# Altium PCB MARLIN.PcbDoc
Units mm, origin at the board's own origin, x right, y up, seen from the top; angles counter-clockwise.
Board outline 104.66 x 106.66 mm, 4 copper layers (Signal Layer 1, Signal Layer 2, Signal Layer 3, Signal Layer 4), stack 2.375 mm thick; 4 components, 5 nets, 28 pads, 108 vias.
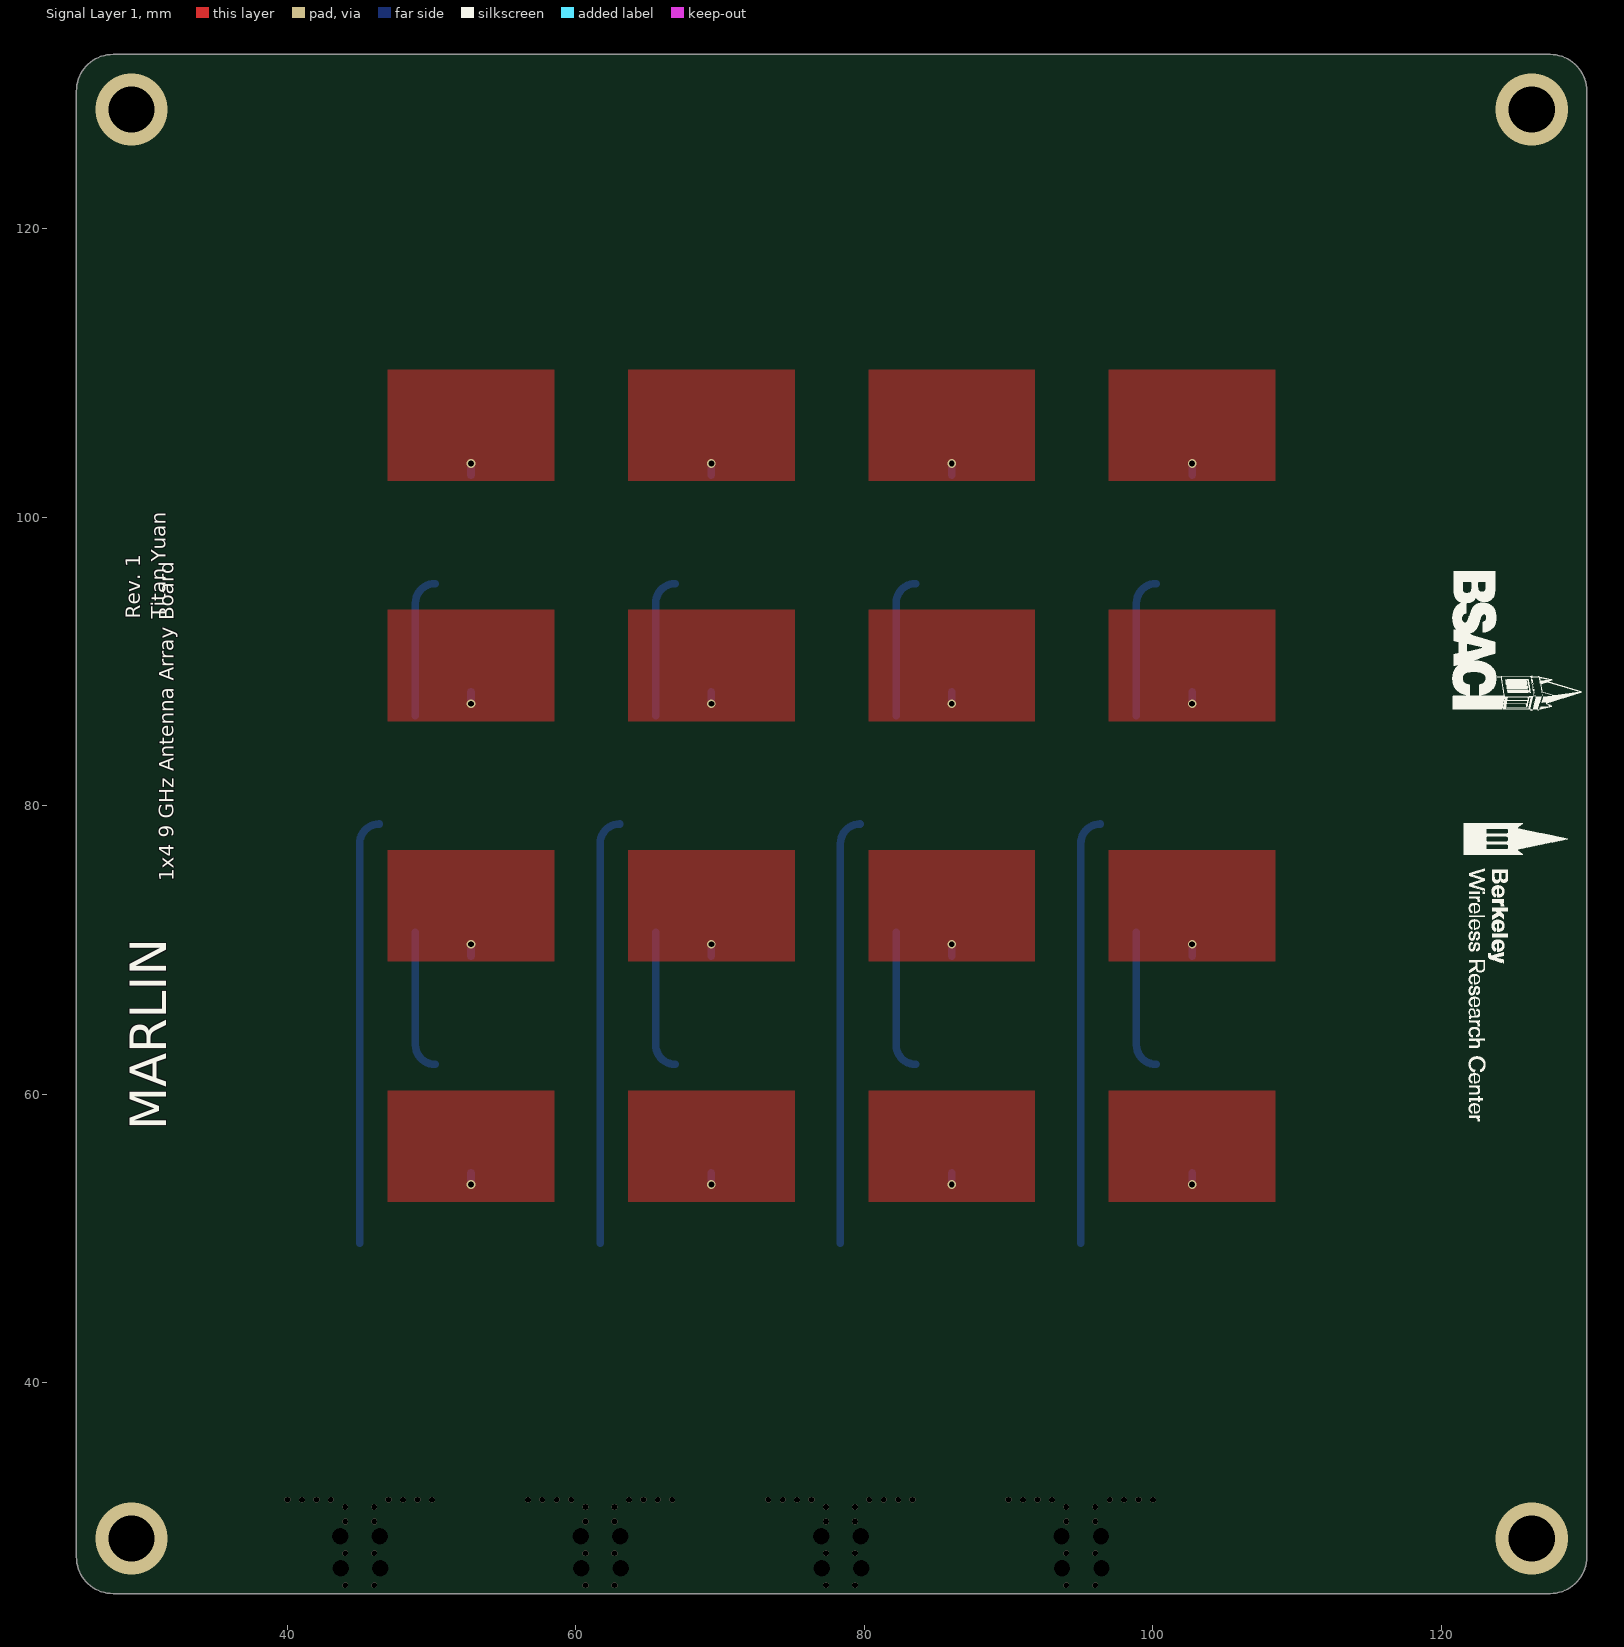
[diagram p0: Signal Layer 1 view]
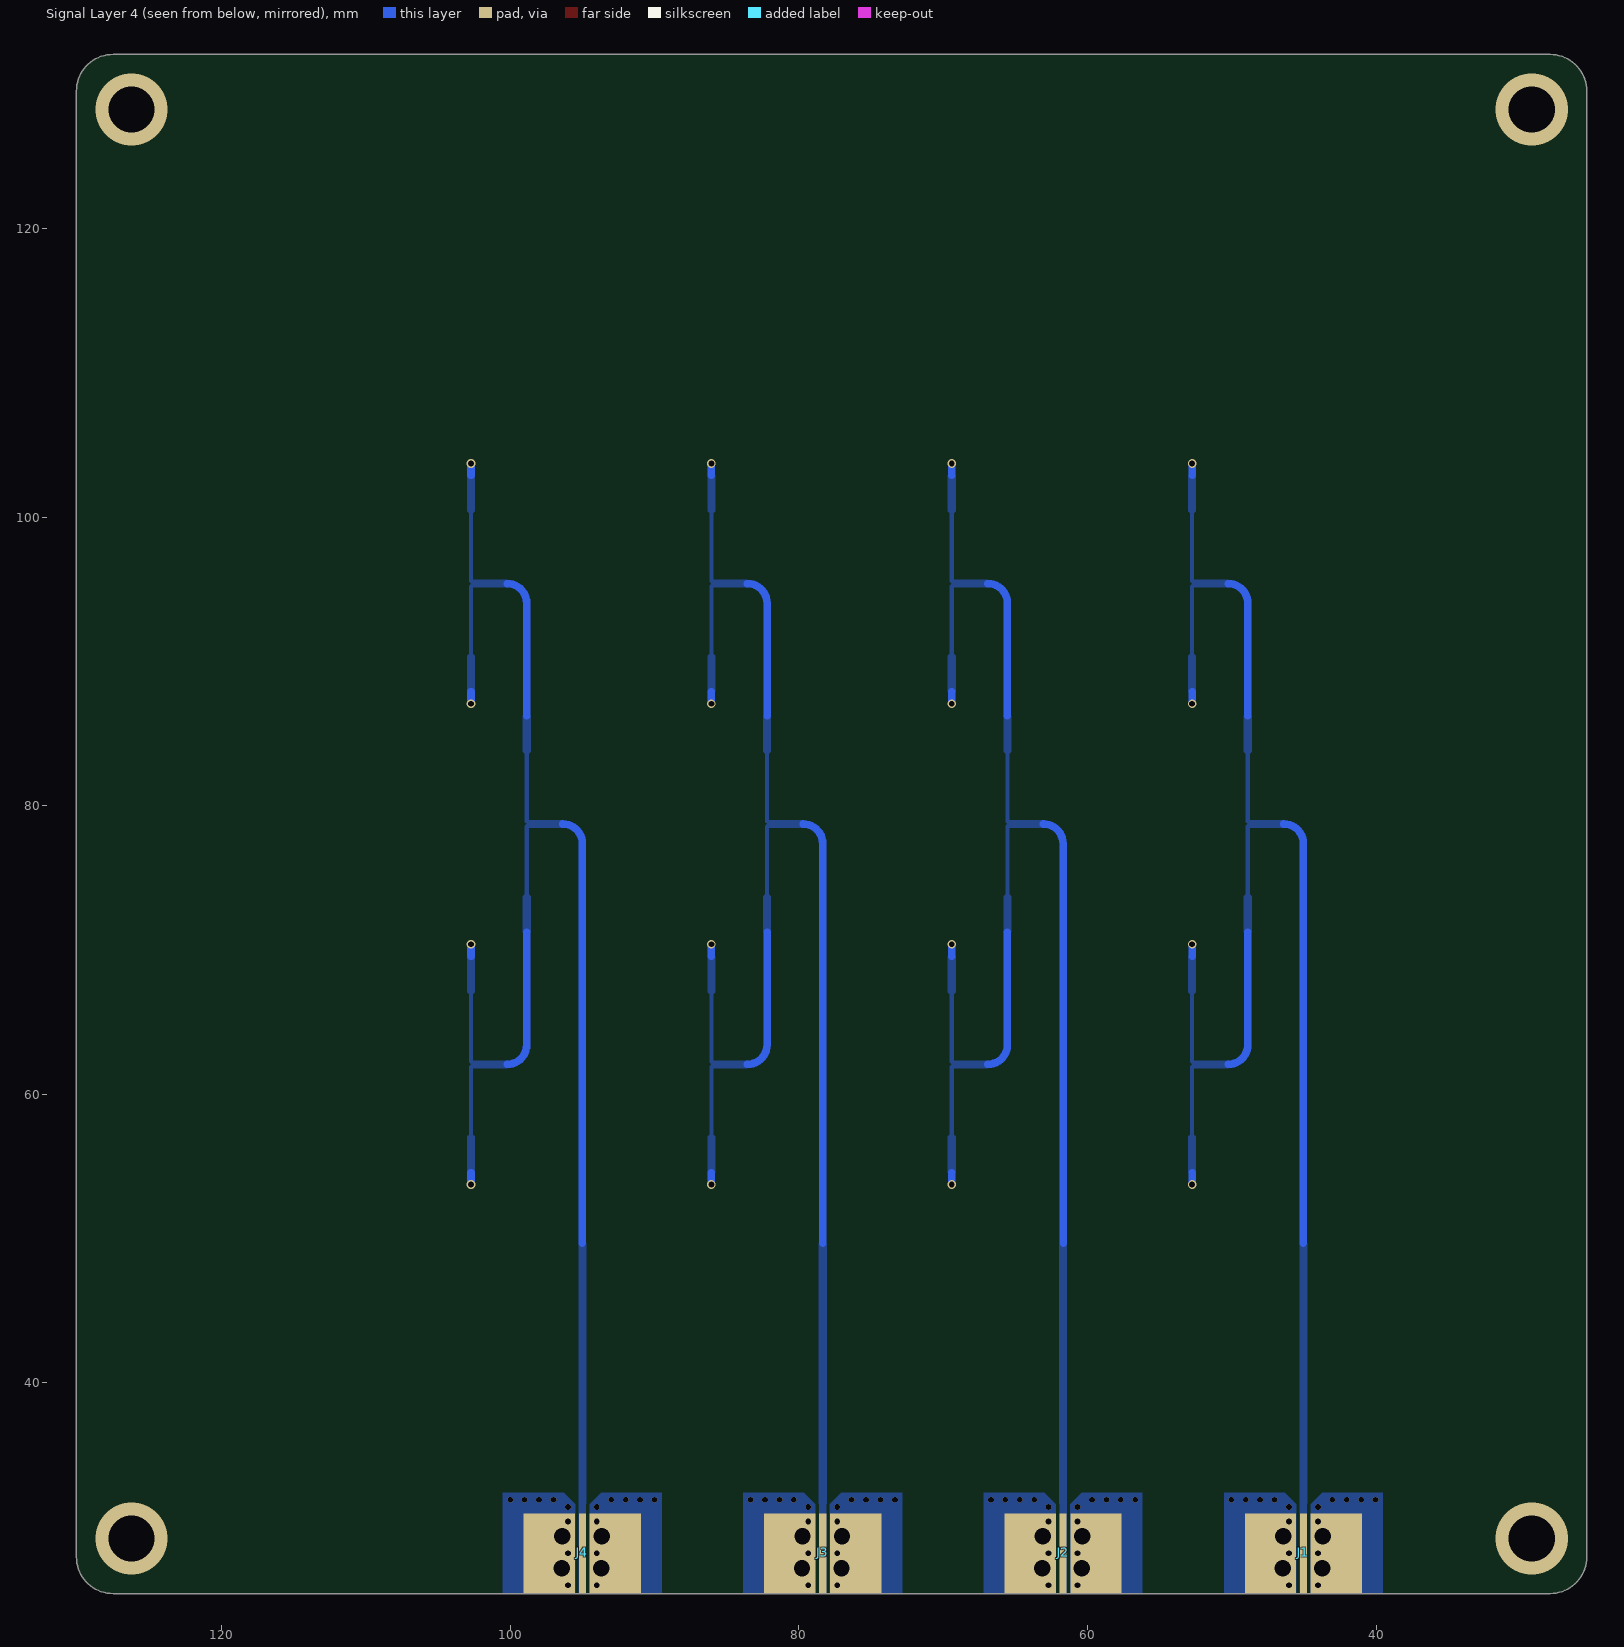
[diagram p1: Signal Layer 4 view, seen from below]
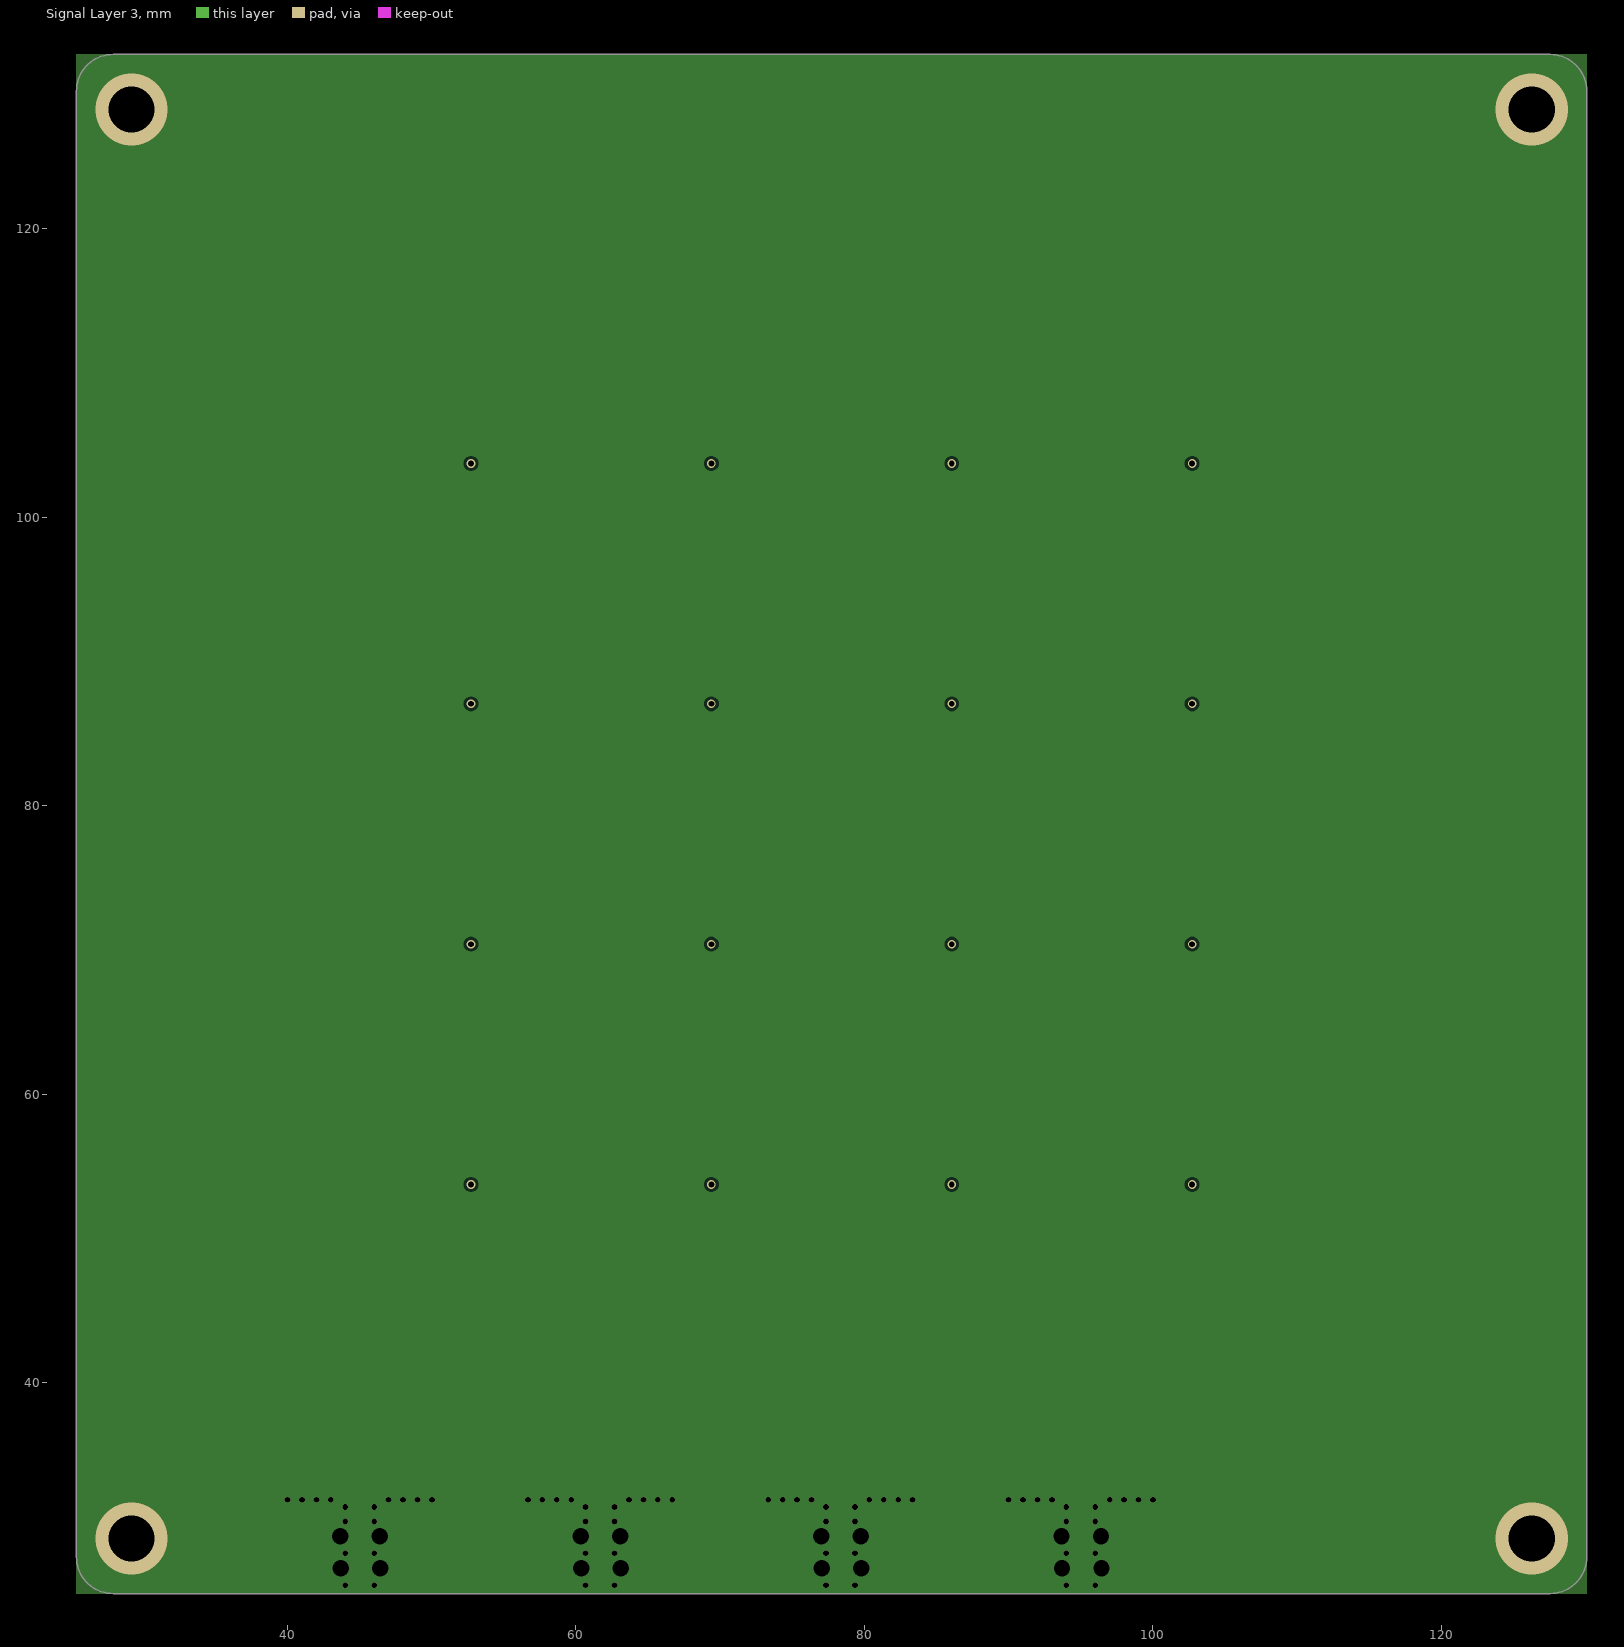
[diagram p2: Signal Layer 3]

## Layer stack, top to bottom
Top Solder: solder mask 0.0127, Solder Resist, Dk 3.5
Signal Layer 1: signal copper 0.035
Core 1: core 1.524, Rogers RO4350B, Dk 3.48
Signal Layer 2: signal copper 0.035
Prepreg 1: prepreg 0.4572, Rogers RO4450F Prepreg, Dk 3.52
Signal Layer 3: signal copper 0.035
Core 2: core 0.254, Rogers RO4350B, Dk 3.48
Signal Layer 4: signal copper 0.035
Bottom Solder: solder mask 0.0127, Solder Resist, Dk 3.5

## Board outline
27.94,25.4 cw(c27.94,27.94) 25.4,27.94 25.4,129.515 cw(c27.94,129.515) 27.94,132.055 127.515,132.055 cw(c127.515,129.515) 130.055,129.515 130.055,27.933 130.055,27.94 cw(c127.515,27.94) 127.515,25.4

## Design rules (kind name [scope] priority, off if disabled: settings)
Clearance [All] p1: gap=0.2 ignorepadtopadclearanceinfootprint=FALSE except(0: Arc-Fill Arc-Poly Arc-Region Track-Fill Track-Poly Track-Region)
PolygonConnect [All] p1: connectstyle=Direct reliefconductorwidth=0.254 reliefentries=4 polygonreliefangle="90 Angle" airgapwidth=0.254
RoutingVias [All] p1: holewidth=0.711 width=1.27 viastyle="Through Hole" minholewidth=0.711 minwidth=1.27 maxholewidth=0.711 maxwidth=1.27
SolderMaskExpansion [All] p1: expansion=0 istentingtop=FALSE
SupplyNets "Schematic Supply Nets" [InNet('GND')] p1: voltage=0.000
Width "50 Ω" [InNetClass('50 Ω')] p1: maxlimit=0.527 minlimit=0.527 preferedwidth=0.527
Width [All] p2: maxlimit=0.254 minlimit=0.254 preferedwidth=0.254
30 further rules are at their usual default settings.

## Classes and differential pairs
net class "50 Ω": ANTENNA_1 ANTENNA_2 ANTENNA_3 ANTENNA_4
component class MARLIN: J?

## Components (designator, comment, footprint, x,y, rotation, side; value= is the part's Value field where it differs from the comment)
J1 "901-10512-1" 901-10512-1 45.031,25.4 r90 bottom
J2 "901-10512-1" 901-10512-1 61.686,25.4 r90 bottom
J3 "901-10512-1" 901-10512-1 78.341,25.4 r90 bottom
J4 "901-10512-1" 901-10512-1 94.996,25.4 r90 bottom

## Footprints (in the part's own frame and the unit in brackets; to place one, negate y for a bottom-side part, rotate by r counter-clockwise, add the part's x,y. Pads: shape width x height; smd on the part's side, far side on the other; paste and mask are expansions set on the pad)
901-10512-1 [mm] "SMA PCB End Launch Straight Jack 50 Ohm 0.085 Square Flange High Frequency 0.015 Pin"
  rect 5.54x0.49 smd: 1(2.77,0)
  round 0 hole 1.14: 2(1.75,-1.3) 2(1.75,1.435) 2(3.96,-1.335) 2(3.96,1.4)
  rect 5.54x3.564 smd: 2(2.77,-2.283) 2(2.77,2.283)
  body extent -9.53,-3.18 4.55,3.18, height 3.36

## Part data
J1 J2 J3 J4: "RF / Coaxial Connector, SMA Coaxial, Straight Flanged Jack, Solder, 50 ohm, Beryllium Copper", Case/Package=SMA, Clock Frequency=26.5GHz, Manufacturer=Amphenol, Max Operating Temperature=165°C, Maximum Frequency="26.5 GHz", Min Operating Temperature=-65°C, Supplier Part Number=ARF2501-ND, Voltage Rating=170V, Category="RF / Coaxial Connectors", ComponentLink1Description=https://datasheet.octopart.com:443/901-10512-1-Amphenol-RF-datasheet-67291281.pdf?src-supplier=TME, ComponentLink1URL=https://datasheet.octopart.com:443/901-10512-1-Amphenol-RF-datasheet-67291281.pdf?src-supplier=TME, ComponentLink2Description=https://datasheet.octopart.com:443/901-10512-1-Amphenol-datasheet-151206439.pdf?src-supplier=IHS, ComponentLink2URL=https://datasheet.octopart.com:443/901-10512-1-Amphenol-datasheet-151206439.pdf?src-supplier=IHS, ComponentLink3Description=https://datasheet.octopart.com:443/901-10512-1-Amphenol-RF-datasheet-67291285.pdf?src-supplier=Newark, ComponentLink3URL=https://datasheet.octopart.com:443/901-10512-1-Amphenol-RF-datasheet-67291285.pdf?src-supplier=Newark, ComponentLink4Description=https://datasheet.octopart.com:443/901-10512-1-Amphenol-RF-datasheet-114836026.pdf?src-supplier=RS+(Formerly+Allied+Electronics), ComponentLink4URL=https://datasheet.octopart.com:443/901-10512-1-Amphenol-RF-datasheet-114836026.pdf?src-supplier=RS+(Formerly+Allied+Electronics), ComponentLink5Description=https://datasheet.octopart.com:443/901-10512-1-Amphenol-RF-datasheet-177020667.pdf?src-supplier=Burklin+Elektronik, ComponentLink5URL=https://datasheet.octopart.com:443/901-10512-1-Amphenol-RF-datasheet-177020667.pdf?src-supplier=Burklin+Elektronik, ComponentLink6Description=https://datasheet.octopart.com:443/901-10512-1-Amphenol-RF-datasheet-181430700.pdf?src-supplier=JRH+Electronics, ComponentLink6URL=https://datasheet.octopart.com:443/901-10512-1-Amphenol-RF-datasheet-181430700.pdf?src-supplier=JRH+Electronics, Connector Type="SMA, Socket", Contact Material=Copper, Fastening Type=Threaded, Impedance=50Ω, Lifecycle Status=Production, Manufacturer Part Number=901-10512-1, Mounting Technology="Edge, Through Hole", Orientation=Straight, Pricing="1=11.3, 10=9.599, 25=8.9976, 50=8.568, 100=8.159, 300=7.55083, 500=7.28374, 1000=6.93654 (USD)", RoHS=Compliant, Stock=96, Supplier=DigiKey, Termination=Solder

## Via types
v1: diameter 0.4, hole 0.4, Signal Layer 1 to Signal Layer 4, tented both sides, 64 vias
v2: diameter 0.4, hole 0.4, Signal Layer 1 to Signal Layer 4, 24 vias
v3: diameter 0.6, hole 0.4, Signal Layer 1 to Signal Layer 4, tented both sides, 16 vias
v4: diameter 5, hole 3.2, Signal Layer 1 to Signal Layer 4, 4 vias

## Nets (pads, with @x,y where several pads share a name; then routed paths per layer and width w, separated by ;. In a path a pad name is that pad's centre, name@x,y a point inside that pad or via, vN(x,y) a via of type N, cw(c..) or ccw(c..) an arc to the next point about the centre after c; other vN are vias at no path point)
ANTENNA_1: J1.1 | length 53
  Signal Layer 4 w0.527: 45.031,49.69 45.031,77.372 cw(c46.388,77.372) 46.388,78.729 ; 48.888,71.229 48.888,63.43 ccw(c50.245,63.43) 50.245,62.073 ; 48.888,86.229 48.888,94.027 cw(c50.245,94.027) 50.245,95.384 ; v3@52.742,53.749 v3(52.745,53.746) 52.745,54.573 ; v3@52.742,103.708 v3(52.745,103.711) 52.745,102.884 ; 52.745,69.573 v3(52.745,70.401) ; v3(52.745,87.056) 52.745,87.884
ANTENNA_2: J2.1 | length 53
  Signal Layer 4 w0.527: 61.686,49.69 61.686,77.372 cw(c63.043,77.372) 63.043,78.729 ; 65.543,71.229 65.543,63.43 ccw(c66.9,63.43) 66.9,62.073 ; 65.543,86.229 65.543,94.027 cw(c66.9,94.027) 66.9,95.384 ; v3@69.397,53.749 v3(69.4,53.746) 69.4,54.573 ; v3@69.397,103.708 v3(69.4,103.711) 69.4,102.884 ; 69.4,69.573 v3(69.4,70.401) ; v3(69.4,87.056) 69.4,87.884
ANTENNA_3: J3.1 | length 53
  Signal Layer 4 w0.527: 78.341,49.69 78.341,77.372 cw(c79.698,77.372) 79.698,78.729 ; 82.198,71.229 82.198,63.43 ccw(c83.555,63.43) 83.555,62.073 ; 82.198,86.229 82.198,94.027 cw(c83.555,94.027) 83.555,95.384 ; v3@86.052,53.749 v3(86.055,53.746) 86.055,54.573 ; v3@86.052,103.708 v3(86.055,103.711) 86.055,102.884 ; 86.055,69.573 v3(86.055,70.401) ; v3(86.055,87.056) 86.055,87.884
ANTENNA_4: J4.1 | length 53
  Signal Layer 4 w0.527: 94.996,49.69 94.996,77.372 cw(c96.353,77.372) 96.353,78.729 ; 98.853,71.229 98.853,63.43 ccw(c100.21,63.43) 100.21,62.073 ; 98.853,86.229 98.853,94.027 cw(c100.21,94.027) 100.21,95.384 ; v3@102.707,53.749 v3(102.71,53.746) 102.71,54.573 ; v3@102.707,103.708 v3(102.71,103.711) 102.71,102.884 ; 102.71,69.573 v3(102.71,70.401) ; v3(102.71,87.056) 102.71,87.884
GND: J1.2 J2.2 J3.2 J4.2
  other v1: 44.03,25.98 46.032,25.98 60.685,25.98 62.687,25.98 77.34,25.98 79.342,25.98 93.995,25.98 95.997,25.98 44.03,28.19 46.032,28.19 60.685,28.19 62.687,28.19 77.34,28.19 79.342,28.19 93.995,28.19 95.997,28.19 44.03,30.4 46.032,30.4 60.685,30.4 62.687,30.4 77.34,30.4 79.342,30.4 93.995,30.4 95.997,30.4 44.03,31.4 46.032,31.4 60.685,31.4 62.687,31.4 77.34,31.4 79.342,31.4 93.995,31.4 95.997,31.4 40.03,31.9 41.03,31.9 42.03,31.9 43.03,31.9 47.032,31.9 48.032,31.9 49.032,31.9 50.032,31.9 56.685,31.9 57.685,31.9 58.685,31.9 59.685,31.9 63.687,31.9 64.687,31.9 65.687,31.9 66.687,31.9 73.34,31.9 74.34,31.9 75.34,31.9 76.34,31.9 80.342,31.9 81.342,31.9 82.342,31.9 83.342,31.9 89.995,31.9 90.995,31.9 91.995,31.9 92.995,31.9 96.997,31.9 97.997,31.9 98.997,31.9 99.997,31.9
  other v2: 44.03,25.98 46.032,25.98 60.685,25.98 62.687,25.98 77.34,25.98 79.342,25.98 93.995,25.98 95.997,25.98 44.03,28.19 46.032,28.19 60.685,28.19 62.687,28.19 77.34,28.19 79.342,28.19 93.995,28.19 95.997,28.19 44.03,30.4 46.032,30.4 60.685,30.4 62.687,30.4 77.34,30.4 79.342,30.4 93.995,30.4 95.997,30.4
  other v4: 29.21,29.21 126.245,29.21 29.21,128.245 126.245,128.245

## Polygon pours and split planes (outlines as drawn)
ANTENNA_4 on Signal Layer 4 "ANTENNA_4_L04_P252" (solid, pour order 252): 102.71,95.384 102.579,95.253 102.579,90.518 102.446,90.385 102.446,87.884 102.974,87.884 102.974,90.385 102.84,90.518 102.84,95.253
ANTENNA_3 on Signal Layer 4 "ANTENNA_3_L04_P236" (solid, pour order 236): 79.698,78.992 79.698,78.465 82.198,78.465 82.198,78.992
ANTENNA_2 on Signal Layer 4 "ANTENNA_2_L04_P227" (solid, pour order 227): 63.043,78.992 63.043,78.465 65.543,78.465 65.543,78.992
ANTENNA_1 on Signal Layer 4 "ANTENNA_1_L04_P218" (solid, pour order 218): 46.388,78.992 46.388,78.465 48.888,78.465 48.888,78.992
ANTENNA_4 on Signal Layer 4 "ANTENNA_4_L04_P253" (solid, pour order 253): 102.446,102.884 102.974,102.884 102.974,100.382 102.84,100.249 102.84,95.514 102.71,95.384 102.579,95.514 102.579,100.249 102.446,100.382
ANTENNA_4 on Signal Layer 4 "ANTENNA_4_L04_P251" (solid, pour order 251): 100.21,95.648 100.21,95.12 102.71,95.12 102.71,95.648
ANTENNA_4 on Signal Layer 4 "ANTENNA_4_L04_P250" (solid, pour order 250): 102.446,69.573 102.974,69.573 102.974,67.072 102.84,66.939 102.84,62.204 102.71,62.073 102.579,62.204 102.579,66.939 102.446,67.072
ANTENNA_4 on Signal Layer 4 "ANTENNA_4_L04_P249" (solid, pour order 249): 102.71,62.073 102.579,61.943 102.579,57.208 102.446,57.075 102.446,54.573 102.974,54.573 102.974,57.075 102.84,57.208 102.84,61.943
ANTENNA_4 on Signal Layer 4 "ANTENNA_4_L04_P248" (solid, pour order 248): 100.21,62.337 100.21,61.81 102.71,61.81 102.71,62.337
ANTENNA_4 on Signal Layer 4 "ANTENNA_4_L04_P247" (solid, pour order 247): 98.589,86.229 99.117,86.229 99.117,83.727 98.983,83.594 98.983,78.859 98.853,78.729 98.722,78.859 98.722,83.594 98.589,83.727
ANTENNA_4 on Signal Layer 4 "ANTENNA_4_L04_P246" (solid, pour order 246): 98.853,78.729 98.722,78.598 98.722,73.863 98.589,73.73 98.589,71.229 99.117,71.229 99.117,73.73 98.983,73.863 98.983,78.598
ANTENNA_4 on Signal Layer 4 "ANTENNA_4_L04_P245" (solid, pour order 245): 96.353,78.992 96.353,78.465 98.853,78.465 98.853,78.992
ANTENNA_3 on Signal Layer 4 "ANTENNA_3_L04_P244" (solid, pour order 244): 85.791,102.884 86.319,102.884 86.319,100.382 86.185,100.249 86.185,95.514 86.055,95.384 85.924,95.514 85.924,100.249 85.791,100.382
ANTENNA_3 on Signal Layer 4 "ANTENNA_3_L04_P243" (solid, pour order 243): 86.055,95.384 85.924,95.253 85.924,90.518 85.791,90.385 85.791,87.884 86.319,87.884 86.319,90.385 86.185,90.518 86.185,95.253
ANTENNA_3 on Signal Layer 4 "ANTENNA_3_L04_P242" (solid, pour order 242): 83.555,95.648 83.555,95.12 86.055,95.12 86.055,95.648
ANTENNA_3 on Signal Layer 4 "ANTENNA_3_L04_P241" (solid, pour order 241): 85.791,69.573 86.319,69.573 86.319,67.072 86.185,66.939 86.185,62.204 86.055,62.073 85.924,62.204 85.924,66.939 85.791,67.072
ANTENNA_3 on Signal Layer 4 "ANTENNA_3_L04_P240" (solid, pour order 240): 86.055,62.073 85.924,61.943 85.924,57.208 85.791,57.075 85.791,54.573 86.319,54.573 86.319,57.075 86.185,57.208 86.185,61.943
ANTENNA_3 on Signal Layer 4 "ANTENNA_3_L04_P239" (solid, pour order 239): 83.555,62.337 83.555,61.81 86.055,61.81 86.055,62.337
ANTENNA_3 on Signal Layer 4 "ANTENNA_3_L04_P238" (solid, pour order 238): 81.934,86.229 82.462,86.229 82.462,83.727 82.328,83.594 82.328,78.859 82.198,78.729 82.067,78.859 82.067,83.594 81.934,83.727
ANTENNA_3 on Signal Layer 4 "ANTENNA_3_L04_P237" (solid, pour order 237): 82.198,78.729 82.067,78.598 82.067,73.863 81.934,73.73 81.934,71.229 82.462,71.229 82.462,73.73 82.328,73.863 82.328,78.598
ANTENNA_2 on Signal Layer 4 "ANTENNA_2_L04_P235" (solid, pour order 235): 69.136,102.884 69.664,102.884 69.664,100.382 69.53,100.249 69.53,95.514 69.4,95.384 69.269,95.514 69.269,100.249 69.136,100.382
ANTENNA_2 on Signal Layer 4 "ANTENNA_2_L04_P234" (solid, pour order 234): 69.4,95.384 69.269,95.253 69.269,90.518 69.136,90.385 69.136,87.884 69.664,87.884 69.664,90.385 69.53,90.518 69.53,95.253
ANTENNA_2 on Signal Layer 4 "ANTENNA_2_L04_P233" (solid, pour order 233): 66.9,95.648 66.9,95.12 69.4,95.12 69.4,95.648
ANTENNA_2 on Signal Layer 4 "ANTENNA_2_L04_P232" (solid, pour order 232): 69.136,69.573 69.664,69.573 69.664,67.072 69.53,66.939 69.53,62.204 69.4,62.073 69.269,62.204 69.269,66.939 69.136,67.072
ANTENNA_2 on Signal Layer 4 "ANTENNA_2_L04_P231" (solid, pour order 231): 69.4,62.073 69.269,61.943 69.269,57.208 69.136,57.075 69.136,54.573 69.664,54.573 69.664,57.075 69.53,57.208 69.53,61.943
ANTENNA_2 on Signal Layer 4 "ANTENNA_2_L04_P230" (solid, pour order 230): 66.9,62.337 66.9,61.81 69.4,61.81 69.4,62.337
ANTENNA_2 on Signal Layer 4 "ANTENNA_2_L04_P229" (solid, pour order 229): 65.279,86.229 65.807,86.229 65.807,83.727 65.673,83.594 65.673,78.859 65.543,78.729 65.412,78.859 65.412,83.594 65.279,83.727
ANTENNA_2 on Signal Layer 4 "ANTENNA_2_L04_P228" (solid, pour order 228): 65.543,78.729 65.412,78.598 65.412,73.863 65.279,73.73 65.279,71.229 65.807,71.229 65.807,73.73 65.673,73.863 65.673,78.598
ANTENNA_1 on Signal Layer 4 "ANTENNA_1_L04_P226" (solid, pour order 226): 52.481,102.884 53.009,102.884 53.009,100.382 52.875,100.249 52.875,95.514 52.745,95.384 52.614,95.514 52.614,100.249 52.481,100.382
ANTENNA_1 on Signal Layer 4 "ANTENNA_1_L04_P225" (solid, pour order 225): 52.745,95.384 52.614,95.253 52.614,90.518 52.481,90.385 52.481,87.884 53.009,87.884 53.009,90.385 52.875,90.518 52.875,95.253
ANTENNA_1 on Signal Layer 4 "ANTENNA_1_L04_P224" (solid, pour order 224): 50.245,95.648 50.245,95.12 52.745,95.12 52.745,95.648
ANTENNA_1 on Signal Layer 4 "ANTENNA_1_L04_P223" (solid, pour order 223): 52.481,69.573 53.009,69.573 53.009,67.072 52.875,66.939 52.875,62.204 52.745,62.073 52.614,62.204 52.614,66.939 52.481,67.072
ANTENNA_1 on Signal Layer 4 "ANTENNA_1_L04_P222" (solid, pour order 222): 52.745,62.073 52.614,61.943 52.614,57.208 52.481,57.075 52.481,54.573 53.009,54.573 53.009,57.075 52.875,57.208 52.875,61.943
ANTENNA_1 on Signal Layer 4 "ANTENNA_1_L04_P221" (solid, pour order 221): 50.245,62.337 50.245,61.81 52.745,61.81 52.745,62.337
ANTENNA_1 on Signal Layer 4 "ANTENNA_1_L04_P220" (solid, pour order 220): 48.624,86.229 49.152,86.229 49.152,83.727 49.018,83.594 49.018,78.859 48.888,78.729 48.757,78.859 48.757,83.594 48.624,83.727
ANTENNA_1 on Signal Layer 4 "ANTENNA_1_L04_P219" (solid, pour order 219): 48.888,78.729 48.757,78.598 48.757,73.863 48.624,73.73 48.624,71.229 49.152,71.229 49.152,73.73 49.018,73.863 49.018,78.598
ANTENNA_1 on Signal Layer 4 "ANTENNA_1_L04_P089" (solid, pour order 89): 44.786,31.6 44.767,31.619 44.767,49.69 45.295,49.69 45.295,31.619 45.276,31.6 45.276,25.4 44.786,25.4
ANTENNA_4 on Signal Layer 4 "ANTENNA_4_L04_P119" (solid, pour order 119): 94.751,31.6 94.732,31.619 94.732,49.69 95.26,49.69 95.26,31.619 95.241,31.6 95.241,25.4 94.751,25.4
ANTENNA_3 on Signal Layer 4 "ANTENNA_3_L04_P116" (solid, pour order 116): 78.096,31.6 78.077,31.619 78.077,49.69 78.605,49.69 78.605,31.619 78.586,31.6 78.586,25.4 78.096,25.4
GND on Signal Layer 4 "GND_L04_P115" (solid, pour order 115): 78.842,29.36 78.842,31.6 79.642,32.4 83.842,32.4 83.842,25.4 78.842,25.4
ANTENNA_2 on Signal Layer 4 "ANTENNA_2_L04_P113" (solid, pour order 113): 61.441,31.6 61.422,31.619 61.422,49.69 61.95,49.69 61.95,31.619 61.931,31.6 61.931,25.4 61.441,25.4
GND on Signal Layer 4 "GND_L04_P088" (solid, pour order 88): 45.532,29.36 45.532,31.6 46.332,32.4 50.532,32.4 50.532,25.4 45.532,25.4
GND on Signal Layer 4 "GND_L04_P112" (solid, pour order 112): 62.187,29.36 62.187,31.6 62.987,32.4 67.187,32.4 67.187,25.4 62.187,25.4
GND on Signal Layer 4 "GND_L04_P118" (solid, pour order 118): 95.497,29.36 95.497,31.6 96.297,32.4 100.497,32.4 100.497,25.4 95.497,25.4
GND on Signal Layer 4 "GND_L04_P117" (solid, pour order 117): 89.495,25.4 89.495,32.4 93.695,32.4 94.495,31.6 94.495,25.4
GND on Signal Layer 4 "GND_L04_P087" (solid, pour order 87): 39.53,25.4 39.53,32.4 43.73,32.4 44.53,31.6 44.53,25.4
GND on Signal Layer 4 "GND_L04_P111" (solid, pour order 111): 56.185,25.4 56.185,32.4 60.385,32.4 61.185,31.6 61.185,25.4
GND on Signal Layer 4 "GND_L04_P114" (solid, pour order 114): 72.84,25.4 72.84,32.4 77.04,32.4 77.84,31.6 77.84,25.4
ANTENNA_4 on Signal Layer 1 "ANTENNA_4_L01_P209" (solid, pour order 209): 96.946,69.203 96.946,76.91 108.474,76.91 108.474,69.203
ANTENNA_4 on Signal Layer 1 "ANTENNA_4_L01_P213" (solid, pour order 213): 96.946,85.858 96.946,93.565 108.474,93.565 108.474,85.858
ANTENNA_3 on Signal Layer 1 "ANTENNA_3_L01_P212" (solid, pour order 212): 80.291,85.858 80.291,93.565 91.819,93.565 91.819,85.858
ANTENNA_2 on Signal Layer 1 "ANTENNA_2_L01_P211" (solid, pour order 211): 63.636,85.858 63.636,93.565 75.164,93.565 75.164,85.858
ANTENNA_3 on Signal Layer 1 "ANTENNA_3_L01_P208" (solid, pour order 208): 80.291,69.203 80.291,76.91 91.819,76.91 91.819,69.203
ANTENNA_2 on Signal Layer 1 "ANTENNA_2_L01_P207" (solid, pour order 207): 63.636,69.203 63.636,76.91 75.164,76.91 75.164,69.203
ANTENNA_4 on Signal Layer 1 "ANTENNA_4_L01_P205" (solid, pour order 205): 96.946,52.548 96.946,60.255 108.474,60.255 108.474,52.548
ANTENNA_3 on Signal Layer 1 "ANTENNA_3_L01_P204" (solid, pour order 204): 80.291,52.548 80.291,60.255 91.819,60.255 91.819,52.548
ANTENNA_2 on Signal Layer 1 "ANTENNA_2_L01_P203" (solid, pour order 203): 63.636,52.548 63.636,60.255 75.164,60.255 75.164,52.548
ANTENNA_4 on Signal Layer 1 "ANTENNA_4_L01_P217" (solid, pour order 217): 96.946,102.513 96.946,110.22 108.474,110.22 108.474,102.513
ANTENNA_3 on Signal Layer 1 "ANTENNA_3_L01_P216" (solid, pour order 216): 80.291,102.513 80.291,110.22 91.819,110.22 91.819,102.513
ANTENNA_2 on Signal Layer 1 "ANTENNA_2_L01_P215" (solid, pour order 215): 63.636,102.513 63.636,110.22 75.164,110.22 75.164,102.513
ANTENNA_1 on Signal Layer 1 "ANTENNA_1_L01_P214" (solid, pour order 214): 46.981,102.513 46.981,110.22 58.509,110.22 58.509,102.513
ANTENNA_1 on Signal Layer 1 "ANTENNA_1_L01_P210" (solid, pour order 210): 46.981,85.858 46.981,93.565 58.509,93.565 58.509,85.858
ANTENNA_1 on Signal Layer 1 "ANTENNA_1_L01_P206" (solid, pour order 206): 46.981,69.203 46.981,76.91 58.509,76.91 58.509,69.203
ANTENNA_1 on Signal Layer 1 "ANTENNA_1_L01_P202" (solid, pour order 202): 46.981,52.548 46.981,60.255 58.509,60.255 58.509,52.548
no net on Top Solder "NONET_L03_P000" (solid, pour order 0): 35.4,132.055 120.055,132.055 120.055,25.4 35.4,25.4
no net on Bottom Solder "NONET_L03_P001" (solid, pour order 1): 35.4,132.055 120.055,132.055 120.055,25.4 35.4,25.4
GND on Signal Layer 3 "GND_L03_P002" (solid, pour order 2): 25.4,132.055 130.055,132.055 130.055,25.4 25.4,25.4

## Silkscreen, mask and mechanical layers (free items; w line width, h text height)
Top Overlay:
  drawing of 41 lines, arcs and shapes, not listed
  text "Rev. 1" at 29.819,92.957 h1.02 r90
  text "Titan Yuan" at 31.601,92.957 h1.02 r90
  text "1x4 9 GHz Antenna Array Board" at 32.137,74.764 h1.02 r90
  text "MARLIN" at 31.629,57.492 h2.54 r90
Mechanical 1:
  lines w0.254: 130.055,27.933 130.055,129.515 ccw(c127.515,129.515) 127.515,132.055 27.94,132.055 ccw(c27.94,129.515) 25.4,129.515 25.4,27.94 ccw(c27.94,27.94) 27.94,25.4 127.515,25.4 ccw(c127.515,27.94) 130.055,27.94